# Altium PCB RasPi_Hat_Temp.PcbDoc
Units mm, origin at the board's own origin, x right, y up, seen from the top; angles counter-clockwise.
Board outline 56.13 x 65.02 mm, 2 copper layers (Top Layer, Bottom Layer), stack 0.325 mm thick; 22 components, 38 nets, 148 pads, 100 vias.
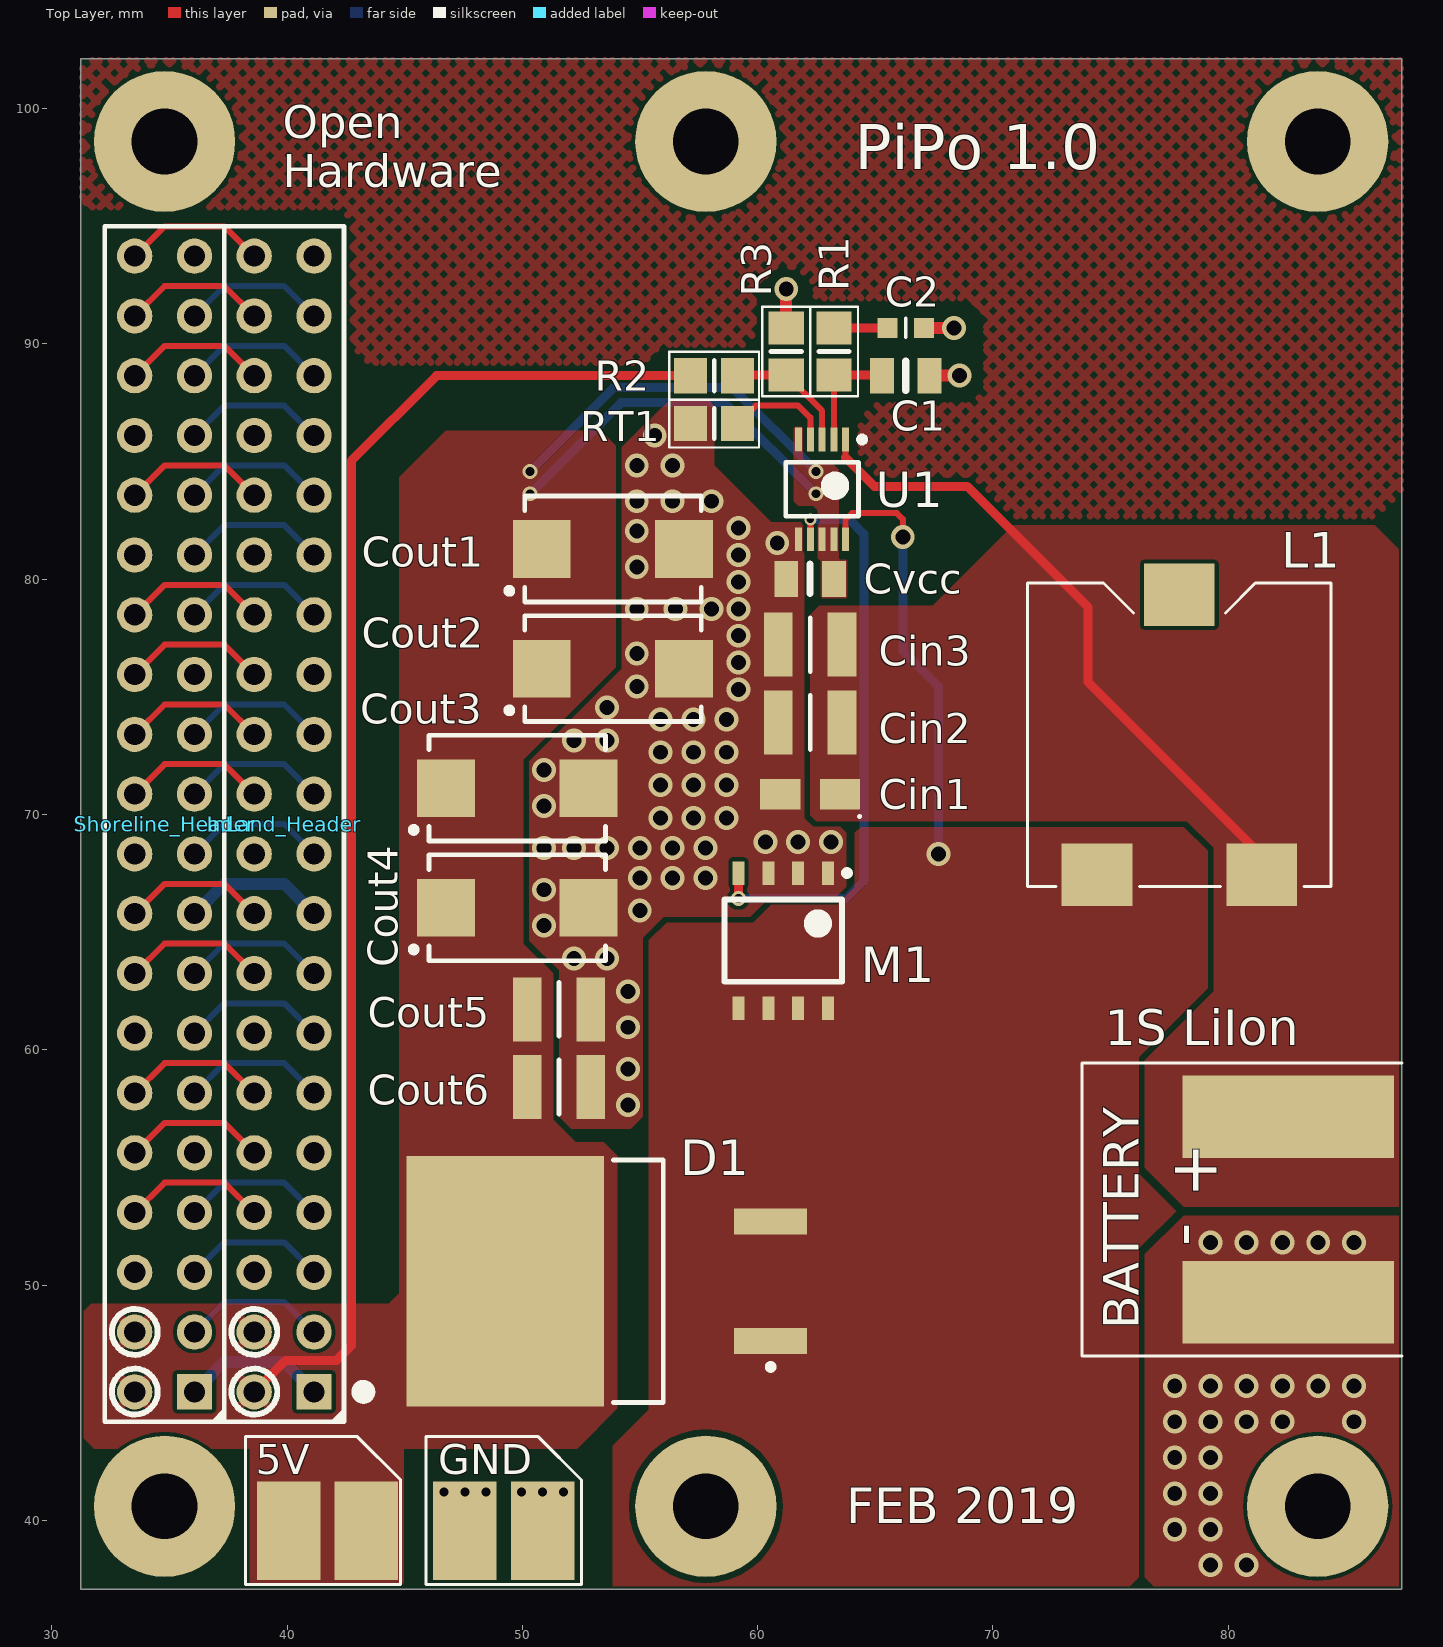
[diagram p0: Top Layer view]
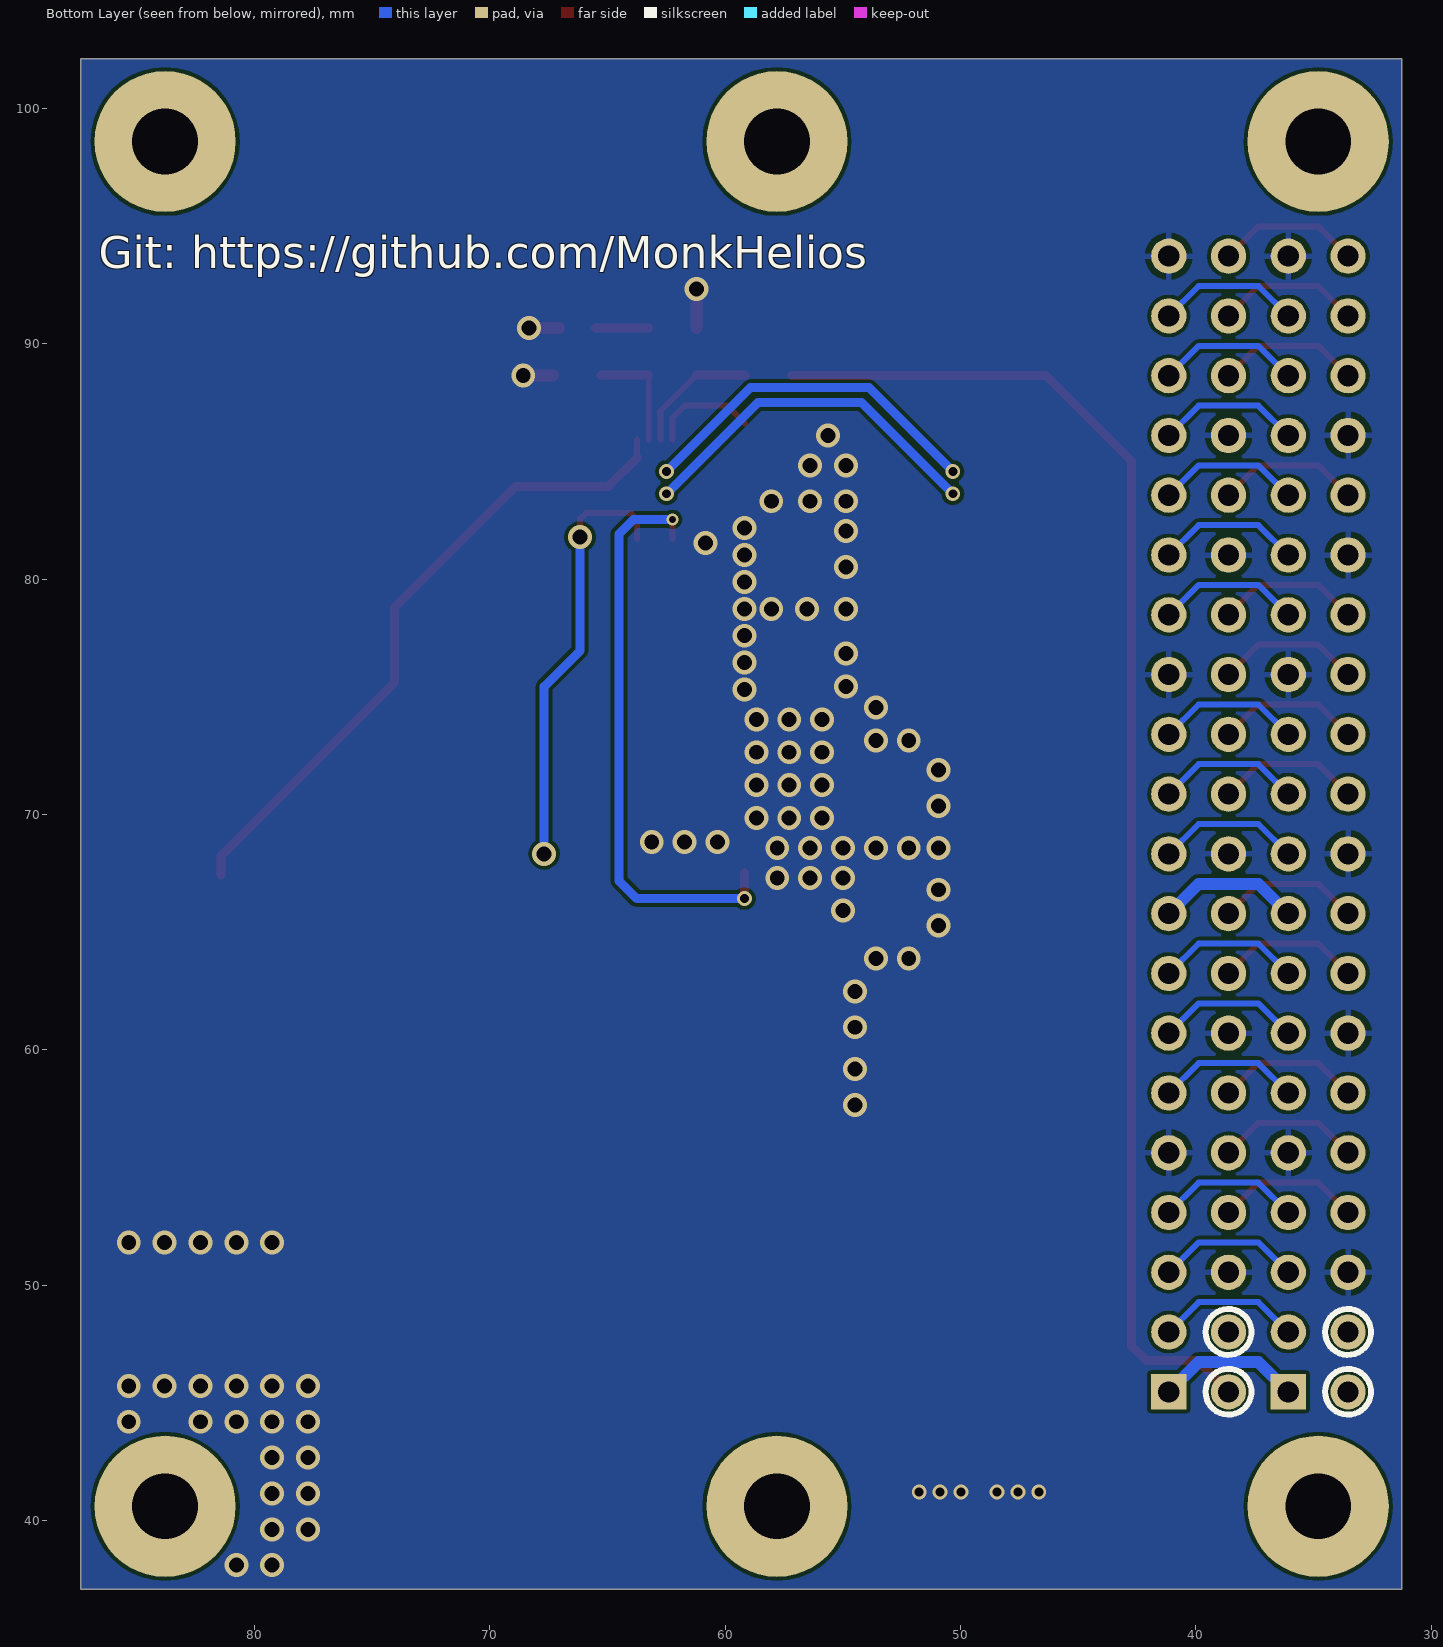
[diagram p1: Bottom Layer view, seen from below]
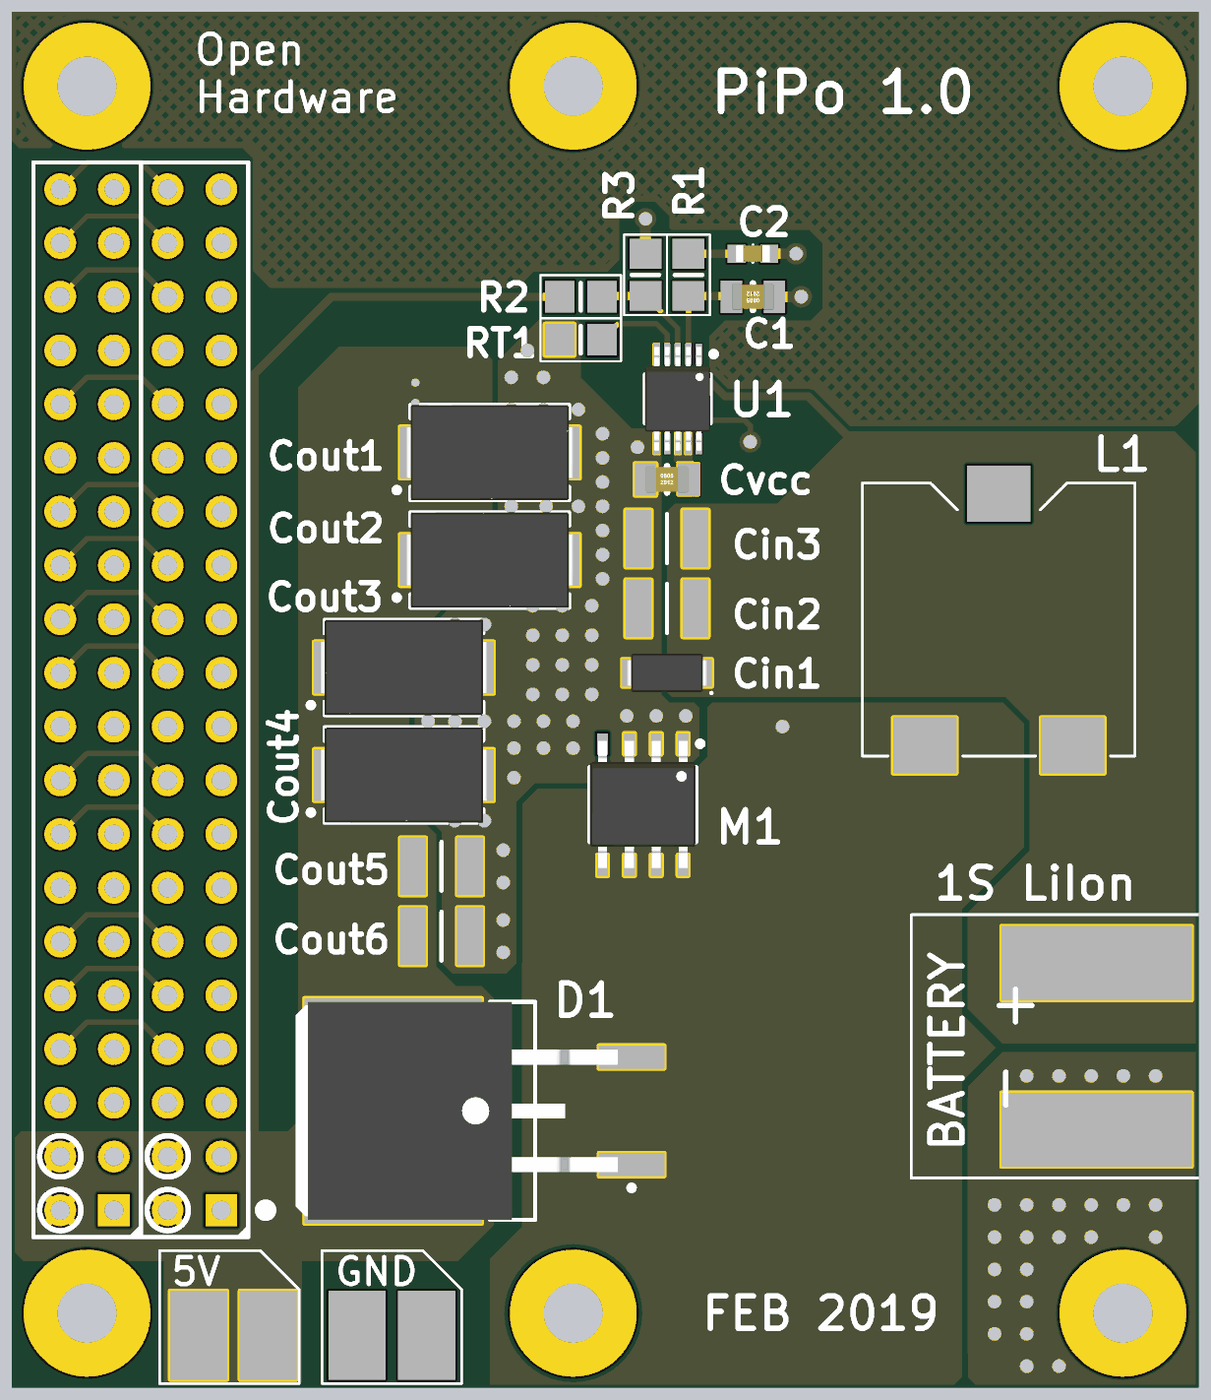
[diagram p2: 3D render of the assembled board from above, using the file's embedded part models]

## Layer stack, top to bottom
Top Solder: solder mask 0.0102, Solder Resist, Dk 3.5
Top Layer: signal copper 0.0356
Dielectric 1: core 0.254, FR-4, Dk 4.2
Bottom Layer: signal copper 0.0356
Bottom Solder: solder mask 0.0102, Solder Resist, Dk 3.5

## Board outline
87.376,102.108 87.376,37.084 31.242,37.084 31.242,102.108

## Design rules (kind name [scope] priority, off if disabled: settings)
Clearance Clearance_5 [InNamedPolygon('Top Layer_vo')] p1: gap=0.152 ignorepadtopadclearanceinfootprint=FALSE
Clearance Clearance_4 [InNamedPolygon('Top Layer_vo')] p2: gap=0.152 ignorepadtopadclearanceinfootprint=FALSE
Clearance Clearance_3 [InNamedPolygon('Top Layer_vo')] p3: gap=0.254 ignorepadtopadclearanceinfootprint=FALSE
Clearance Clearance_2 [InNamedPolygon('Top Layer_switch')] p4: gap=0.254 ignorepadtopadclearanceinfootprint=TRUE
Clearance Clearance_1 [InNamedPolygon('GND')] p5: gap=0.152 ignorepadtopadclearanceinfootprint=FALSE
Clearance "Stitching GND" [IsStitchingVia and InNet('GND') vs (IsVia and (Not IsStitchingVia)) Or IsPad] p6: gap=0.127 ignorepadtopadclearanceinfootprint=FALSE
Clearance [All] p7: gap=0.152 ignorepadtopadclearanceinfootprint=FALSE
ComponentClearance [All] p1: gap=0 collisioncheckmode=3 verticalgap=0 showdistances=FALSE
PlaneConnect [All] p1: pad.planeconnectstyle=Relief pad.reliefexpansion=0.508 pad.reliefentries=4 pad.reliefconductorwidth=0.254 pad.reliefairgap=0.254 via.planeconnectstyle=Direct via.reliefexpansion=0.508 via.reliefentries=4 via.reliefconductorwidth=0.254 via.reliefairgap=0.254
PolygonConnect PolygonConnect_9 [All vs IsNamedPolygon('Top Layer_vo')] p1: thpad.connectstyle=Relief thpad.reliefconductorwidth=0.254 thpad.reliefentries=4 thpad.polygonreliefangle="90 Angle" thpad.airgapwidth=0.254 smdpad.connectstyle=Direct smdpad.reliefconductorwidth=0.254 smdpad.reliefentries=4 smdpad.polygonreliefangle="90 Angle" smdpad.airgapwidth=0.254 via.connectstyle=Direct via.reliefconductorwidth=0.254 via.reliefentries=4 via.polygonreliefangle="90 Angle" via.airgapwidth=0.254
PolygonConnect PolygonConnect_8 [All vs IsNamedPolygon('Top Layer_vo')] p2: thpad.connectstyle=Relief thpad.reliefconductorwidth=0.381 thpad.reliefentries=4 thpad.polygonreliefangle="45 Angle" thpad.airgapwidth=0.254 smdpad.connectstyle=Direct smdpad.reliefconductorwidth=0.254 smdpad.reliefentries=4 smdpad.polygonreliefangle="90 Angle" smdpad.airgapwidth=0.254 via.connectstyle=Direct via.reliefconductorwidth=0.254 via.reliefentries=4 via.polygonreliefangle="90 Angle" via.airgapwidth=0.254
PolygonConnect PolygonConnect_7 [All vs IsNamedPolygon('Top Layer_vo')] p3: thpad.connectstyle=Relief thpad.reliefconductorwidth=0.381 thpad.reliefentries=4 thpad.polygonreliefangle="45 Angle" thpad.airgapwidth=0.254 smdpad.connectstyle=Relief smdpad.reliefconductorwidth=0.254 smdpad.reliefentries=4 smdpad.polygonreliefangle="90 Angle" smdpad.airgapwidth=0.254 via.connectstyle=Relief via.reliefconductorwidth=0.254 via.reliefentries=4 via.polygonreliefangle="90 Angle" via.airgapwidth=0.254
PolygonConnect PolygonConnect_6 [All vs IsNamedPolygon('Top Layer_vo')] p4: thpad.connectstyle=Relief thpad.reliefconductorwidth=0.254 thpad.reliefentries=4 thpad.polygonreliefangle="90 Angle" thpad.airgapwidth=0.254 smdpad.connectstyle=Direct smdpad.reliefconductorwidth=0.254 smdpad.reliefentries=4 smdpad.polygonreliefangle="90 Angle" smdpad.airgapwidth=0.254 via.connectstyle=Direct via.reliefconductorwidth=0.254 via.reliefentries=4 via.polygonreliefangle="90 Angle" via.airgapwidth=0.254
PolygonConnect PolygonConnect_5 [All vs IsNamedPolygon('Top Layer_vo')] p5: thpad.connectstyle=Relief thpad.reliefconductorwidth=0.254 thpad.reliefentries=4 thpad.polygonreliefangle="90 Angle" thpad.airgapwidth=0.254 smdpad.connectstyle=Direct smdpad.reliefconductorwidth=0.254 smdpad.reliefentries=4 smdpad.polygonreliefangle="90 Angle" smdpad.airgapwidth=0.254 via.connectstyle=Direct via.reliefconductorwidth=0.254 via.reliefentries=4 via.polygonreliefangle="90 Angle" via.airgapwidth=0.254
PolygonConnect PolygonConnect_4 [All vs IsNamedPolygon('Top Layer_switch')] p6: thpad.connectstyle=Relief thpad.reliefconductorwidth=0.254 thpad.reliefentries=4 thpad.polygonreliefangle="90 Angle" thpad.airgapwidth=0.254 smdpad.connectstyle=Direct smdpad.reliefconductorwidth=0.254 smdpad.reliefentries=4 smdpad.polygonreliefangle="90 Angle" smdpad.airgapwidth=0.254 via.connectstyle=Direct via.reliefconductorwidth=0.254 via.reliefentries=4 via.polygonreliefangle="90 Angle" via.airgapwidth=0.254
PolygonConnect PolygonConnect_3 [All vs IsNamedPolygon('GND')] p7: thpad.connectstyle=Relief thpad.reliefconductorwidth=0.254 thpad.reliefentries=4 thpad.polygonreliefangle="90 Angle" thpad.airgapwidth=0.254 smdpad.connectstyle=Direct smdpad.reliefconductorwidth=0.254 smdpad.reliefentries=4 smdpad.polygonreliefangle="90 Angle" smdpad.airgapwidth=0.254 via.connectstyle=Direct via.reliefconductorwidth=0.254 via.reliefentries=4 via.polygonreliefangle="90 Angle" via.airgapwidth=0.254
PolygonConnect PolygonConnect_2 [All vs IsNamedPolygon('GND')] p8: thpad.connectstyle=Relief thpad.reliefconductorwidth=0.254 thpad.reliefentries=4 thpad.polygonreliefangle="90 Angle" thpad.airgapwidth=0.254 smdpad.connectstyle=Direct smdpad.reliefconductorwidth=0.254 smdpad.reliefentries=4 smdpad.polygonreliefangle="90 Angle" smdpad.airgapwidth=0.254 via.connectstyle=Direct via.reliefconductorwidth=0.254 via.reliefentries=4 via.polygonreliefangle="90 Angle" via.airgapwidth=0.254
PolygonConnect PolygonConnect_1 [All vs IsNamedPolygon('VIN')] p9: thpad.connectstyle=Relief thpad.reliefconductorwidth=0.254 thpad.reliefentries=4 thpad.polygonreliefangle="45 Angle" thpad.airgapwidth=0.254 smdpad.connectstyle=Direct smdpad.reliefconductorwidth=0.254 smdpad.reliefentries=4 smdpad.polygonreliefangle="90 Angle" smdpad.airgapwidth=0.254 via.connectstyle=Direct via.reliefconductorwidth=0.254 via.reliefentries=4 via.polygonreliefangle="90 Angle" via.airgapwidth=0.254
PolygonConnect [All] p10: thpad.connectstyle=Relief thpad.reliefconductorwidth=0.254 thpad.reliefentries=4 thpad.polygonreliefangle="90 Angle" thpad.airgapwidth=0.254 smdpad.connectstyle=Relief smdpad.reliefconductorwidth=0.254 smdpad.reliefentries=4 smdpad.polygonreliefangle="90 Angle" smdpad.airgapwidth=0.254 via.connectstyle=Direct via.reliefconductorwidth=0.254 via.reliefentries=4 via.polygonreliefangle="90 Angle" via.airgapwidth=0.254
RoutingVias [All] p1: holewidth=0.711 width=1.27 viastyle="Through Hole" minholewidth=0.711 minwidth=1.27 maxholewidth=0.711 maxwidth=1.27
SolderMaskExpansion [All] p1: expansion=0.102
UnRoutedNet [All] p1: checkbadconnections=TRUE
Width [All] p1: maxlimit=0.762 minlimit=0.127 preferedwidth=0.305
27 further rules are at their usual default settings.

## Classes and differential pairs
component class RasPi_Hat_Temp: U1
polygon class "DIRECT SMD": VIN

## Components (designator, comment, footprint, x,y, rotation, side; value= is the part's Value field where it differs from the comment)
C1 "47pF" SMD-0805C 66.294,88.646 r90 top
C2 "6.8nF" SMD-0603C 66.294,90.678 r90 top
Cin1 "100uF" TPSA226K006T0300 62.23,70.866 r180 top
Cin2 "22uF" PCBComponent_1#1 62.23,73.914 r0 top
Cin3 "22uF" PCBComponent_1#1 62.23,77.216 r0 top
Cout1 "150uF" EEF-CX0J151R 53.848,81.28 r180 top
Cout2 "150uF" EEF-CX0J151R 53.848,76.2 r180 top
Cout3 "150uF" EEF-CX0J151R 49.784,71.12 r180 top
Cout4 "150uF" EEF-CX0J151R 49.784,66.04 r180 top
Cout5 "22uF" PCBComponent_1#1 51.562,61.722 r180 top
Cout6 "22uF" PCBComponent_1#1 51.562,58.42 r180 top
Cvcc "4.7uF" SMD-0805C 62.23,80.01 r270 top
D1 "MBRB2515L" MBRB2515L 53.594,50.165 r180 top
InLand_Header "Header 20X2" HDR2X20 41.148,45.466 r90 top
L1 "1uH" PCBComponent_1#2 71.472,79.837 r270 top
M1 "FDS7760A" FDS7760A 61.087,64.643 r270 top
R1 "22K" Resistor_0805 63.246,90.678 r270 top
R2 "37.4K" Resistor_0805 57.15,88.646 r0 top
R3 "12K" Resistor_0805 61.214,90.678 r270 top
RT1 "80.6K" Resistor_0805 57.15,86.614 r0 top
Shoreline_Header "Header 20X2" HDR2X20 36.068,45.466 r90 top
U1 "LT1871-1" LTC1871-1 62.738,83.82 r270 top

## Footprints (in the part's own frame and the unit in brackets; to place one, negate y for a bottom-side part, rotate by r counter-clockwise, add the part's x,y. Pads: shape width x height; smd on the part's side, far side on the other; paste and mask are expansions set on the pad)
EEF-CX0J151R [mm] "Aluminium Organic Polymer Capacitors 150uF 6.3VDC 15mOhm SP Polymer"
  rect 2.45x2.45 smd: 1(-3.025,0) 2(3.025,0)
  silkscreen extent -3.75,-2.25 4.52,2.25, body extent -3.97,-2.25 3.97,2.25, height 2
FDS7760A [mm] "N-Channel Logic Level PowerTrench® MOSFET"
  rect 1x0.51 smd: 1(-2.87,1.905) 2(-2.87,0.635) 3(-2.87,-0.635) 4(-2.87,-1.905) 5(2.87,-1.905) 6(2.87,-0.635) 7(2.87,0.635) 8(2.87,1.905)
  silkscreen extent -2.99,-2.5 1.75,2.84, body extent -3,-2.5 3,2.5, height 1.75
HDR2X20 [mm] "Connector; Header; 20x2 Position"
  rect 1.5x1.5 hole 0.9: 1(0,0)
  round 1.5 hole 0.9: 2(0,2.54) 3(2.54,0) 4(2.54,2.54) 5(5.08,0) 6(5.08,2.54) 7(7.62,0) 8(7.62,2.54) 9(10.16,0) 10(10.16,2.54) 11(12.7,0) 12(12.7,2.54) 13(15.24,0) 14(15.24,2.54) 15(17.78,0) 16(17.78,2.54) 17(20.32,0) 18(20.32,2.54) 19(22.86,0) 20(22.86,2.54) 21(25.4,0) 22(25.4,2.54) 23(27.94,0) 24(27.94,2.54) 25(30.48,0) 26(30.48,2.54) 27(33.02,0) 28(33.02,2.54) 29(35.56,0) 30(35.56,2.54) 31(38.1,0) 32(38.1,2.54) 33(40.64,0) 34(40.64,2.54) 35(43.18,0) 36(43.18,2.54) 37(45.72,0) 38(45.72,2.54) 39(48.26,0) 40(48.26,2.54)
  silkscreen extent -1.27,-1.27 49.53,3.81
LTC1871-1 [mm] "Wide Input Range, No RSENSE Current Mode Boost, Flyback and SEPIC Controller"
  rect 1x0.3 smd mask+0.05: 1(-2.115,1) 2(-2.115,0.5) 3(-2.115,0) 4(-2.115,-0.5) 5(-2.115,-1) 6(2.115,-1) 7(2.115,-0.5) 8(2.115,0) 9(2.115,0.5) 10(2.115,1)
  silkscreen extent -2.24,-1.55 1.15,1.83, body extent -2.45,-1.55 2.45,1.55, height 1.1
MBRB2515L [mm] "SCHOTTKY BARRIER RECTIFIER 25 AMPERES, 15 VOLTS"
  rect 3.1x1.1 smd: 3(-6.96,-2.54) 3(-6.96,2.54)
  rect 8.38x10.66 smd: 4(4.32,0)
  silkscreen extent -7.09,-5.15 -0.27,5.15, body extent -6.32,-5.15 8.92,5.15, height 4.93
PCBComponent_1#1 [mm]
  rect 1.22x2.72 smd: 1(-1.35,0) 2(1.35,0)
  silkscreen extent 0,-1.15 0,1.15
PCBComponent_1#2 [mm]
  rect 2.65x3 smd: 1(12.4,2.95) 2(12.4,9.95) 3(0.5,6.45)
  silkscreen extent 0,0 12.9,12.9
Resistor_0805 [mm]
  rect 1.4x1.5 smd: 1(0,0) 2(2,0)
  silkscreen extent -0.9,-1.02 2.91,1.02, body extent -0.07,-0.7 2.07,0.7, height 0.7
SMD-0603C [mm]
  rect 0.85x0.85 smd: 1(0,0.775) 2(0,-0.775)
  silkscreen extent -0.4,0 0.4,0, body extent -0.4,-0.8 0.4,0.8, height 0.9
SMD-0805C [mil]
  rect 60x40 smd: 1(0,40) 2(0,-40)
  silkscreen extent -25,0 25,0, body extent -25,-39 25,39, height 35
TPSA226K006T0300 [mm] "Tantalum Capacitors - Solid SMD 6.3V 22uF 10% 1206 ESR 300mOhm AEC-Q200"
  rect 1.7x1.3 smd: 1(-1.27,0) 2(1.27,0)
  silkscreen extent -2.15,0.9 -2.05,1, body extent -1.92,-0.9 1.92,0.9, height 1.8

## Part data
C1: library part GC321AD72E103KX01D, "CAP CER 10000PF 250V X7T 0805", Digi-Key Part Number=490-13986-1-ND, Manufacturer="Murata Electronics North America", Operating Temperature="-55°C ~ 125°C", Package / Case="0805 (2012 Metric)", Ratings=AEC-Q200, Temperature Coefficient=X7T, Tolerance=±10%, Voltage=250V, @ qty=0, Applications=Automotive, Datasheets=http://search.murata.co.jp/Ceramy/image/img/A01X/G101/ENG/GC321AD72E103KX01-01.pdf, Factory Stock=0, Features=-, Height - Seated (Max)=-, Image=//media.digikey.com/Renders/Murata%20Renders/0805(GC3)200x125.jpg, Lead Spacing=-, Lead Style=-, Minimum Quantity=1, Mounting Type="Surface Mount, MLCC", Packaging="Cut Tape (CT)", Part Number=GC321AD72E103KX01D, Part Status=Active, Quantity Available=4000, Series=GC3, Size / Dimension="0.079\" L x 0.049\" W (2.00mm x 1.25mm)", Thickness (Max)="0.039\" (1.00mm)", Unit Price (USD)=0.3
C2: library part GCJ188R71C104KA01D, "CAP CER 0.1UF 16V X7R 0603", Digi-Key Part Number=490-5796-1-ND, Manufacturer="Murata Electronics North America", Operating Temperature="-55°C ~ 125°C", Package / Case="0603 (1608 Metric)", Ratings=AEC-Q200, Temperature Coefficient=X7R, Tolerance=±10%, Voltage=16V, @ qty=0, Applications="Automotive, Boardflex Sensitive", Datasheets=http://www.murata.com/~/media/webrenewal/support/library/catalog/products/capacitor/mlcc/c03e.ashx, Factory Stock=0, Features="Soft Termination", Height - Seated (Max)=-, Image=//media.digikey.com/Renders/Murata%20Renders/0603%28LQG18%29.jpg, Lead Spacing=-, Lead Style=-, Minimum Quantity=1, Mounting Type="Surface Mount, MLCC", Packaging="Cut Tape (CT)", Part Number=GCJ188R71C104KA01D, Part Status=Active, Quantity Available=22473, Series=GCJ, Size / Dimension="0.063\" L x 0.031\" W (1.60mm x 0.80mm)", Thickness (Max)="0.035\" (0.90mm)", Unit Price (USD)=0.21
Cin1: library part Component_1, "1206_TANTALUM"
Cin2 Cin3 Cout1 Cout2 Cout3 Cout4 Cout5 Cout6 D1 L1 M1 R1 R2 R3 RT1 U1: library part Component_1
  R1 R2 R3 RT1: =10K
Cvcc: library part GC321AD72E103KX01D, "CAP CER 10000PF 250V X5R 0805", Digi-Key Part Number=490-13986-1-ND, Manufacturer="Murata Electronics North America", Operating Temperature="-55°C ~ 125°C", Package / Case="0805 (2012 Metric)", Ratings=AEC-Q200, Temperature Coefficient=X5R, Tolerance=±10%, Voltage=250V, @ qty=0, Applications=Automotive, Datasheets=http://search.murata.co.jp/Ceramy/image/img/A01X/G101/ENG/GC321AD72E103KX01-01.pdf, Factory Stock=0, Features=-, Height - Seated (Max)=-, Image=//media.digikey.com/Renders/Murata%20Renders/0805(GC3)200x125.jpg, Lead Spacing=-, Lead Style=-, Minimum Quantity=1, Mounting Type="Surface Mount, MLCC", Packaging="Cut Tape (CT)", Part Number=GC321AD72E103KX01D, Part Status=Active, Quantity Available=4000, Series=GC3, Size / Dimension="0.079\" L x 0.049\" W (2.00mm x 1.25mm)", Thickness (Max)="0.039\" (1.00mm)", Unit Price (USD)=0.3
InLand_Header Shoreline_Header: "Header, 20-Pin, Dual row", LatestRevisionDate=17-Jul-2002, LatestRevisionNote="Re-released for DXP Platform.", Publisher="Altium Limited"

## Free pads (board coordinates)
  round 6 hole 2.794 unplated: 77(34.798,40.602) 78(34.798,98.598) 79(57.798,98.598) 80(57.798,40.602) 81(83.798,98.598) 82(83.798,40.602)
  rect 9x3.5 smd: 83(82.55,57.15) 84(82.55,49.276)
  rect 2.7x4.2 smd: 85(40.069,39.56) 86(43.37,39.56) 87(47.561,39.56) 88(50.863,39.56)

## Via types
v1: diameter 1.016, hole 0.635, Top Layer to Bottom Layer, tented both sides, 88 vias
v2: diameter 0.635, hole 0.381, Top Layer to Bottom Layer, tented bottom, 6 vias
v3: diameter 0.635, hole 0.381, Top Layer to Bottom Layer, tented both sides, 5 vias
v4: diameter 0.508, hole 0.305, Top Layer to Bottom Layer, tented both sides, 1 vias

## Nets (pads, with @x,y where several pads share a name; then routed paths per layer and width w, separated by ;. In a path a pad name is that pad's centre, name@x,y a point inside that pad or via, vN(x,y) a via of type N, cw(c..) or ccw(c..) an arc to the next point about the centre after c; other vN are vias at no path point)
3: InLand_Header.3 Shoreline_Header.3 | length 6.1
  Bottom Layer w0.254: Shoreline_Header.3 37.338,49.276 39.878,49.276 InLand_Header.3
3V3: InLand_Header.1 InLand_Header.17 Shoreline_Header.1 Shoreline_Header.17 | length 12.3
  Bottom Layer w0.508: Shoreline_Header.1 37.338,46.736 39.878,46.736 InLand_Header.1 ; Shoreline_Header.17 37.338,67.056 39.878,67.056 InLand_Header.17
5: InLand_Header.5 Shoreline_Header.5 | length 6.1
  Bottom Layer w0.254: Shoreline_Header.5 37.338,51.816 39.878,51.816 InLand_Header.5
7: InLand_Header.7 Shoreline_Header.7 | length 6.1
  Bottom Layer w0.254: Shoreline_Header.7 37.338,54.356 39.878,54.356 InLand_Header.7
8: InLand_Header.8 Shoreline_Header.8 | length 6.1
  Top Layer w0.254: Shoreline_Header.8 34.798,54.356 37.338,54.356 InLand_Header.8
10: InLand_Header.10 Shoreline_Header.10 | length 6.1
  Top Layer w0.254: Shoreline_Header.10 34.798,56.896 37.338,56.896 InLand_Header.10
11: InLand_Header.11 Shoreline_Header.11 | length 6.1
  Bottom Layer w0.254: Shoreline_Header.11 37.338,59.436 39.878,59.436 InLand_Header.11
12: InLand_Header.12 Shoreline_Header.12 | length 6.1
  Top Layer w0.254: Shoreline_Header.12 34.798,59.436 37.338,59.436 InLand_Header.12
13: InLand_Header.13 Shoreline_Header.13 | length 6.1
  Bottom Layer w0.254: Shoreline_Header.13 37.338,61.976 39.878,61.976 InLand_Header.13
15: InLand_Header.15 Shoreline_Header.15 | length 6.1
  Bottom Layer w0.254: Shoreline_Header.15 37.338,64.516 39.878,64.516 InLand_Header.15
16: InLand_Header.16 Shoreline_Header.16 | length 6.1
  Top Layer w0.254: Shoreline_Header.16 34.798,64.516 37.338,64.516 InLand_Header.16
18: InLand_Header.18 Shoreline_Header.18 | length 6.1
  Top Layer w0.254: Shoreline_Header.18 34.798,67.056 37.338,67.056 InLand_Header.18
19: InLand_Header.19 Shoreline_Header.19 | length 6.1
  Bottom Layer w0.254: Shoreline_Header.19 37.338,69.596 39.878,69.596 InLand_Header.19
21: InLand_Header.21 Shoreline_Header.21 | length 6.1
  Bottom Layer w0.254: Shoreline_Header.21 37.338,72.136 39.878,72.136 InLand_Header.21
22: InLand_Header.22 Shoreline_Header.22 | length 6.1
  Top Layer w0.254: Shoreline_Header.22 34.798,72.136 37.338,72.136 InLand_Header.22
23: InLand_Header.23 Shoreline_Header.23 | length 6.1
  Bottom Layer w0.254: Shoreline_Header.23 37.338,74.676 39.878,74.676 InLand_Header.23
24: InLand_Header.24 Shoreline_Header.24 | length 6.1
  Top Layer w0.254: Shoreline_Header.24 34.798,74.676 37.338,74.676 InLand_Header.24
26: InLand_Header.26 Shoreline_Header.26 | length 6.1
  Top Layer w0.254: Shoreline_Header.26 34.798,77.216 37.338,77.216 InLand_Header.26
27: InLand_Header.27 Shoreline_Header.27 | length 6.1
  Bottom Layer w0.254: Shoreline_Header.27 37.338,79.756 39.878,79.756 InLand_Header.27
28: InLand_Header.28 Shoreline_Header.28 | length 6.1
  Top Layer w0.254: Shoreline_Header.28 34.798,79.756 37.338,79.756 InLand_Header.28
29: InLand_Header.29 Shoreline_Header.29 | length 6.1
  Bottom Layer w0.254: Shoreline_Header.29 37.338,82.296 39.878,82.296 InLand_Header.29
31: InLand_Header.31 Shoreline_Header.31 | length 6.1
  Bottom Layer w0.254: Shoreline_Header.31 37.338,84.836 39.878,84.836 InLand_Header.31
32: InLand_Header.32 Shoreline_Header.32 | length 6.1
  Top Layer w0.254: Shoreline_Header.32 34.798,84.836 37.338,84.836 InLand_Header.32
33: InLand_Header.33 Shoreline_Header.33 | length 6.1
  Bottom Layer w0.254: Shoreline_Header.33 37.338,87.376 39.878,87.376 InLand_Header.33
35: InLand_Header.35 Shoreline_Header.35 | length 6.1
  Bottom Layer w0.254: Shoreline_Header.35 37.338,89.916 39.878,89.916 InLand_Header.35
36: InLand_Header.36 Shoreline_Header.36 | length 6.1
  Top Layer w0.254: Shoreline_Header.36 34.798,89.916 37.338,89.916 InLand_Header.36
37: InLand_Header.37 Shoreline_Header.37 | length 6.1
  Bottom Layer w0.254: Shoreline_Header.37 37.338,92.456 39.878,92.456 InLand_Header.37
38: InLand_Header.38 Shoreline_Header.38 | length 6.1
  Top Layer w0.254: Shoreline_Header.38 34.798,92.456 37.338,92.456 InLand_Header.38
40: InLand_Header.40 Shoreline_Header.40 | length 6.1
  Top Layer w0.254: Shoreline_Header.40 34.798,94.996 37.338,94.996 InLand_Header.40
GND: C1.2 C2.2 Cin1.2 Cin2.1 Cin3.1 Cout1.1 Cout2.1 Cout3.1 Cout4.1 Cout5.1 Cout6.1 Cvcc.2 InLand_Header.6 InLand_Header.9 InLand_Header.14 InLand_Header.20 InLand_Header.25 InLand_Header.30 InLand_Header.34 InLand_Header.39 M1.1 M1.2 M1.3 pad.84 pad.87 pad.88 R3.1 RT1.1 Shoreline_Header.6 Shoreline_Header.9 Shoreline_Header.14 Shoreline_Header.20 Shoreline_Header.25 Shoreline_Header.30 Shoreline_Header.34 Shoreline_Header.39 U1.6 | length 4.2
  Top Layer w0.508: R3.1 v1(61.214,92.329) ; C2.2 v1(68.339,90.678) ; C1.2 v1(68.58,88.646)
  other v1: 79.248,38.1 80.772,38.1 77.724,39.624 79.248,39.624 77.724,41.148 79.248,41.148 77.724,42.672 79.248,42.672 77.724,44.196 79.248,44.196 80.772,44.196 82.296,44.196 85.344,44.196 77.724,45.72 79.248,45.72 80.772,45.72 82.296,45.72 83.82,45.72 85.344,45.72 79.248,51.816 80.772,51.816 82.296,51.816 83.82,51.816 85.344,51.816 54.483,57.658 54.483,59.182 54.483,60.96 54.483,62.484 52.197,63.881 53.594,63.881 50.927,65.278 54.991,65.913 50.927,66.802 54.991,67.31 56.388,67.31 57.785,67.31 50.927,68.58 52.197,68.58 53.594,68.58 54.991,68.58 56.388,68.58 57.785,68.58 60.325,68.834 61.722,68.834 63.119,68.834 55.88,69.85 57.277,69.85 58.674,69.85 50.927,70.358 55.88,71.247 57.277,71.247 58.674,71.247 50.927,71.882 55.88,72.644 57.277,72.644 58.674,72.644 52.197,73.152 53.594,73.152 55.88,74.041 57.277,74.041 58.674,74.041 53.594,74.549 59.182,75.311 54.864,75.438 59.182,76.454 54.864,76.835 59.182,77.597 54.864,78.74 56.515,78.74 58.039,78.74 59.182,78.74 59.182,79.883 54.864,80.518 59.182,81.026 60.833,81.534 54.864,82.042 59.182,82.169 54.864,83.312 56.388,83.312 58.039,83.312 54.864,84.836 56.388,84.836 55.626,86.106
  other v2: 46.672,41.212 47.561,41.212 48.45,41.212 49.974,41.212 50.863,41.212 51.752,41.212
NetC1_1: C1.1 R1.2 U1.2 | length 4.8
  Top Layer w0.254: U1.2 63.246,85.943 R1.2
  Top Layer w0.381: R1.2 65.246,88.678 C1.1
NetC2_1: C2.1 R1.1 | length 2.3
  Top Layer w0.381: R1.1 C2.1
NetD1_3: D1.3 L1.1 M1.5 M1.6 M1.7 M1.8 U1.10 | length 18.3
  Top Layer w0.254: U1.10 63.738,82.534 64.008,82.804 65.913,82.804 66.167,82.55 v1(66.167,81.788)
  Bottom Layer w0.381: v1(66.167,81.788) 66.167,76.962 67.691,75.438 v1(67.691,68.326)
NetM1_4: M1.4 U1.7 | length 24.8
  Top Layer w0.254: U1.7 v4(62.238,82.542)
  Top Layer w0.381: v3(59.182,66.421) M1.4
  Bottom Layer w0.381: v3(59.182,66.421) 63.754,66.421 64.516,67.183 64.516,81.915 63.889,82.542 v4(62.238,82.542)
NetR2_2: R2.2 R3.2 U1.3 | length 5.5
  Top Layer w0.254: R3.2 62.738,87.154 U1.3
  Top Layer w0.381: R2.2 59.182,88.678 R3.2
NetRT1_2: RT1.2 U1.4 | length 4.5
  Top Layer w0.254: RT1.2 59.912,87.376 61.722,87.376 62.238,86.86 U1.4
V: Cout1.2 Cout2.2 Cout3.2 Cout4.2 Cout5.2 Cout6.2 Cvcc.1 D1.4 InLand_Header.2 InLand_Header.4 pad.85 pad.86 R2.1 Shoreline_Header.2 Shoreline_Header.4 U1.5 U1.8 U1.9 | length 88.9
  Top Layer w0.381: InLand_Header.2 39.941,46.799 42.1,46.799 42.735,47.434 42.735,85.026 46.355,88.646 R2.1
  Bottom Layer w0.381: v3(50.327,83.629) 54.2,87.503 58.61,87.503 v3(62.484,83.629) ; v3(50.327,84.582) 53.883,88.138 58.928,88.138 v3(62.484,84.582)
VIN: Cin1.1 Cin2.2 Cin3.2 L1.2 pad.83 U1.1 | length 28.1
  Top Layer w0.254: 63.738,85.169 U1.1
  Top Layer w0.381: 63.738,85.169 64.96,83.947 68.897,83.947 74.041,78.803 74.041,75.629 81.422,68.247 L1.2
pads on no net: L1.3

## Polygon pours and split planes (outlines as drawn)
GND on Bottom Layer "GND" (solid, pour order 0): 31.242,102.108 87.376,102.108 87.376,37.084 31.242,37.084
no net on Top Layer "Top Layer_NONET" (hatched 45Degree grid 0.55 track 0.3, pour order 20): 31.305,102.044 87.312,102.044 87.312,83.757 86.233,82.677 70.929,82.677 69.215,84.391 65.215,84.391 64.389,85.217 64.389,86.741 65.024,87.376 69.088,87.376 69.723,88.011 69.723,91.249 68.961,92.011 68.897,91.948 62.484,91.948 62.484,92.519 61.722,93.281 60.706,93.281 59.817,92.392 59.817,90.424 59.372,89.98 55.88,89.98 55.118,89.218 43.497,89.218 42.799,89.916 42.799,95.25 42.227,95.822 31.623,95.822 31.305,96.139
V on Top Layer "Top Layer_vo" (solid, pour order 18): 38.417,37.338 44.958,37.338 44.958,43.561 44.45,44.069 38.925,44.069 38.417,43.561
VIN on Top Layer "VIN" (solid, pour order 4): 87.249,53.34 78.105,53.34 76.454,54.991 76.454,59.563 79.375,62.484 79.375,68.58 78.232,69.723 62.484,69.723 62.23,69.977 62.23,78.486 62.611,78.867 67.437,78.867 70.866,82.296 86.233,82.296 87.249,81.28
GND on Top Layer "GND" (solid, pour order 6): 87.249,52.959 87.249,37.211 76.835,37.211 76.454,37.592 76.454,51.308 78.105,52.959
GND on Top Layer "GND" (solid, pour order 8): 52.07,56.642 54.61,56.642 55.118,57.15 55.118,64.77 56.007,65.659 59.69,65.659 60.452,66.421 63.246,66.421 63.754,66.929 63.754,69.215 63.5,69.469 62.357,69.469 61.976,69.85 61.976,82.296 61.849,82.423 60.579,82.423 58.166,84.836 58.166,87.376 57.912,87.63 56.261,87.63 54.229,85.598 54.229,76.2 50.292,72.263 50.292,64.643 51.562,63.373 51.562,57.15
NetD1_3 on Top Layer "Top Layer_switch" (solid, pour order 10): 55.372,64.643 56.134,65.405 59.817,65.405 60.579,66.167 63.373,66.167 64.135,66.929 64.135,69.215 64.389,69.469 78.105,69.469 79.121,68.453 79.121,62.611 76.2,59.69 76.2,54.737 77.787,53.149 76.2,51.562 76.2,37.592 75.819,37.211 53.848,37.211 53.848,43.18 55.372,44.704
V on Top Layer "Top Layer_vo" (solid, pour order 14): 61.531,86.423 61.531,83.312 61.722,83.121 62.357,83.121 62.547,82.931 62.547,80.899 62.674,80.772 62.674,79.248 62.738,79.184 63.754,79.184 63.817,79.248 63.817,80.772 63.754,80.835 63.5,80.835 63.436,80.899 63.436,84.645 63.055,85.026 62.039,85.026 61.912,85.153 61.912,86.423 61.849,86.487 61.595,86.487
V on Top Layer "Top Layer_vo" (solid, pour order 16): 53.975,85.661 53.975,76.263 50.038,72.327 50.038,64.516 51.308,63.246 51.308,57.023 52.261,56.07 53.467,56.07 54.038,55.499 54.038,44.767 52.324,43.053 31.814,43.053 31.369,43.497 31.369,48.895 31.686,49.212 44.323,49.212 44.767,49.657 44.767,84.328 46.736,86.296 53.34,86.296

## Silkscreen, mask and mechanical layers (free items; w line width, h text height)
Top Overlay:
  circle w0.508: c43.243,45.466 r0.254
  circle w0.254: c33.53,45.475 r0.975
  circle w0.254: c38.61,45.475 r0.975
  circle w0.254: c38.61,48.015 r0.975
  circle w0.254: c33.53,48.015 r0.975
  lines w0.127: 36.83,44.196 37.338,44.704 ; 37.084,44.196 37.084,44.45 ; 41.91,44.196 42.418,44.704 ; 42.418,44.196 42.164,44.45 ; 87.376,46.99 86.614,46.99 73.787,46.99 73.787,52.07 73.787,59.436 86.106,59.436 87.376,59.436 ; 37.084,44.45 37.338,44.196 37.338,44.45 37.084,44.45 ; 42.164,44.45 42.164,44.196 42.418,44.45 42.164,44.45 ; 45.91,37.274 45.91,43.561 ; 45.91,37.274 45.91,43.561 ; 45.91,37.274 52.514,37.274 52.514,41.719 50.673,43.561 45.91,43.561 ; 38.227,37.274 44.831,37.274 44.831,41.719 42.989,43.561 38.227,43.561 38.227,37.274
  text "PiPo 1.0" at 64.135,97.409 h1.91
  text "Open  / Hardware" at 39.814,96.647 h1.4
  text "1S LiIon" at 74.739,60.198 h1.52
  text "+" at 79.502,53.721 h2.03 r90
  text "-" at 77.47,52.642 h2.03 r270
  text "BATTERY" at 76.2,48.133 h1.52 r90
  text "5V" at 38.672,41.974 h1.27
  text "GND" at 46.419,41.974 h1.27
  text "FEB 2019" at 63.754,39.878 h1.52
Bottom Overlay:
  circle w0.254: c33.53,45.47 r0.975
  circle w0.254: c38.61,45.47 r0.975
  circle w0.254: c38.61,48.01 r0.975
  circle w0.254: c33.53,48.01 r0.975
  text "Git: https://github.com/MonkHelios" at 86.623,93.213 h1.37
Board Outline:
  lines w0.127: 31.242,37.084 87.376,37.084 87.376,102.108 31.242,102.108 31.242,37.084
  lines w0.254: 31.242,103.378 31.242,103.886 ; 32.766,103.124 31.242,103.632 ; 32.766,104.14 31.242,103.632 ; 51.412,103.632 31.242,103.632 ; 67.206,103.632 87.376,103.632 ; 85.852,103.124 87.376,103.632 ; 85.852,104.14 87.376,103.632 ; 87.376,103.378 87.376,103.886 ; 88.328,38.608 88.837,37.084 ; 88.328,100.584 88.837,102.108 ; 88.582,37.084 89.09,37.084 ; 88.582,102.108 89.09,102.108 ; 88.837,61.572 88.837,37.084 ; 88.837,77.62 88.837,102.108 ; 89.344,38.608 88.837,37.084 ; 89.344,100.584 88.837,102.108
  text "56.134 (mm)" at 51.666,102.718 h1.52
  text "65.024 (mm)" at 89.751,61.826 h1.52 r90
Cu_to_Edge:
  text "The battery connection pads extends  / to the board edge but the edge should  / not be plated" at 90.805,48.323 h2.03
Plated_Via_Info:
  text "Plate all holes (including vias) which have a  / hole size below 100mil. / Do not plate holes which are above 200mil." at 91.313,89.98 h1.78